# Altium PCB PCB1.PcbDoc
Units mm, origin at the board's own origin, x right, y up, seen from the top; angles counter-clockwise.
Board outline 46.99 x 49.15 mm, 2 copper layers (Top Layer, Bottom Layer); 31 components, 28 nets, 112 pads, 6 vias.
Unrouted connection lines stored in the file: 8.
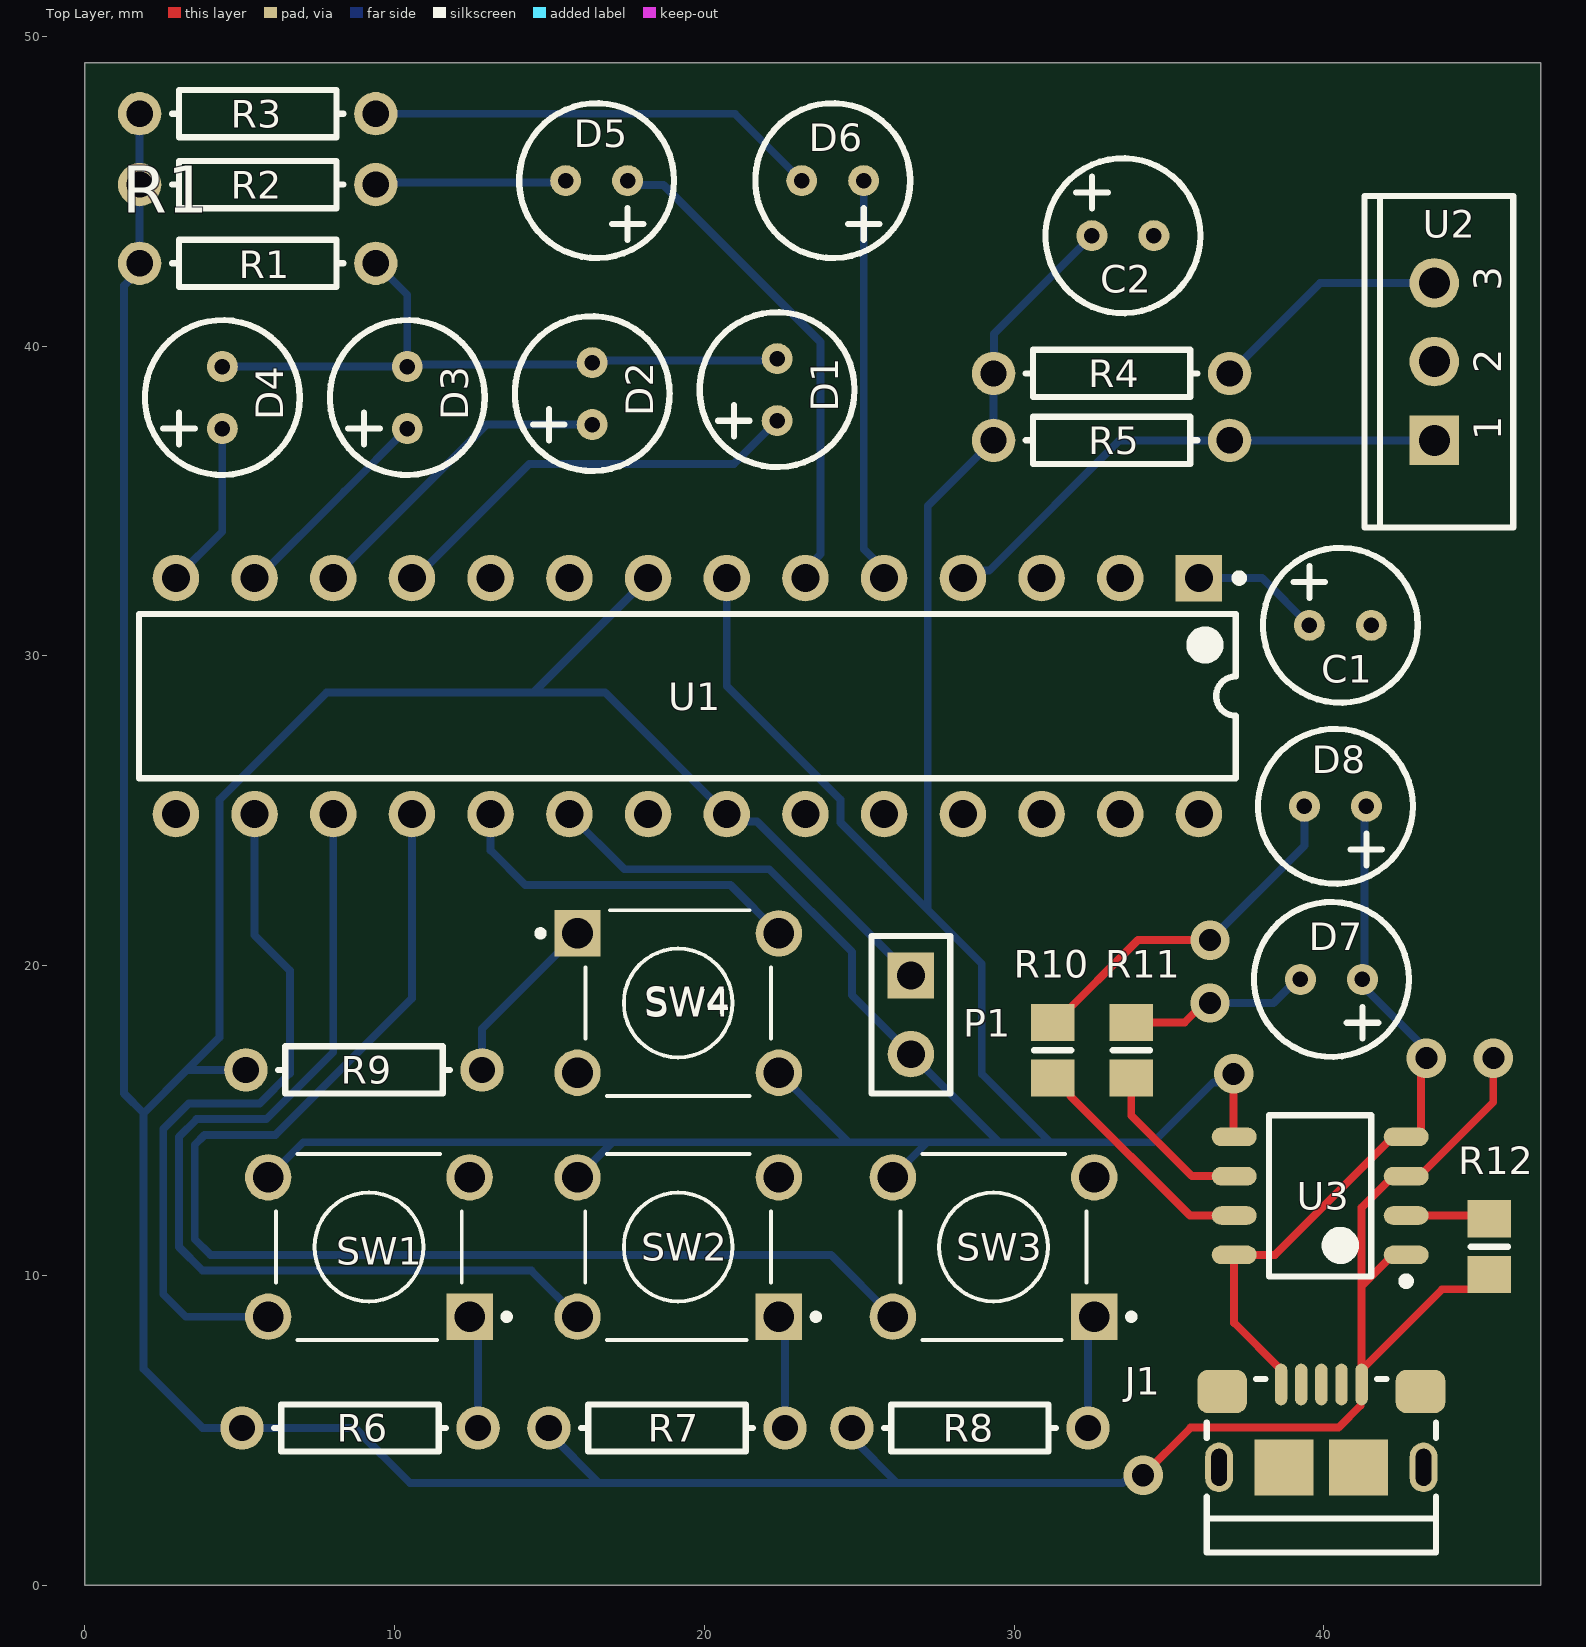
[diagram p0: Top Layer view]
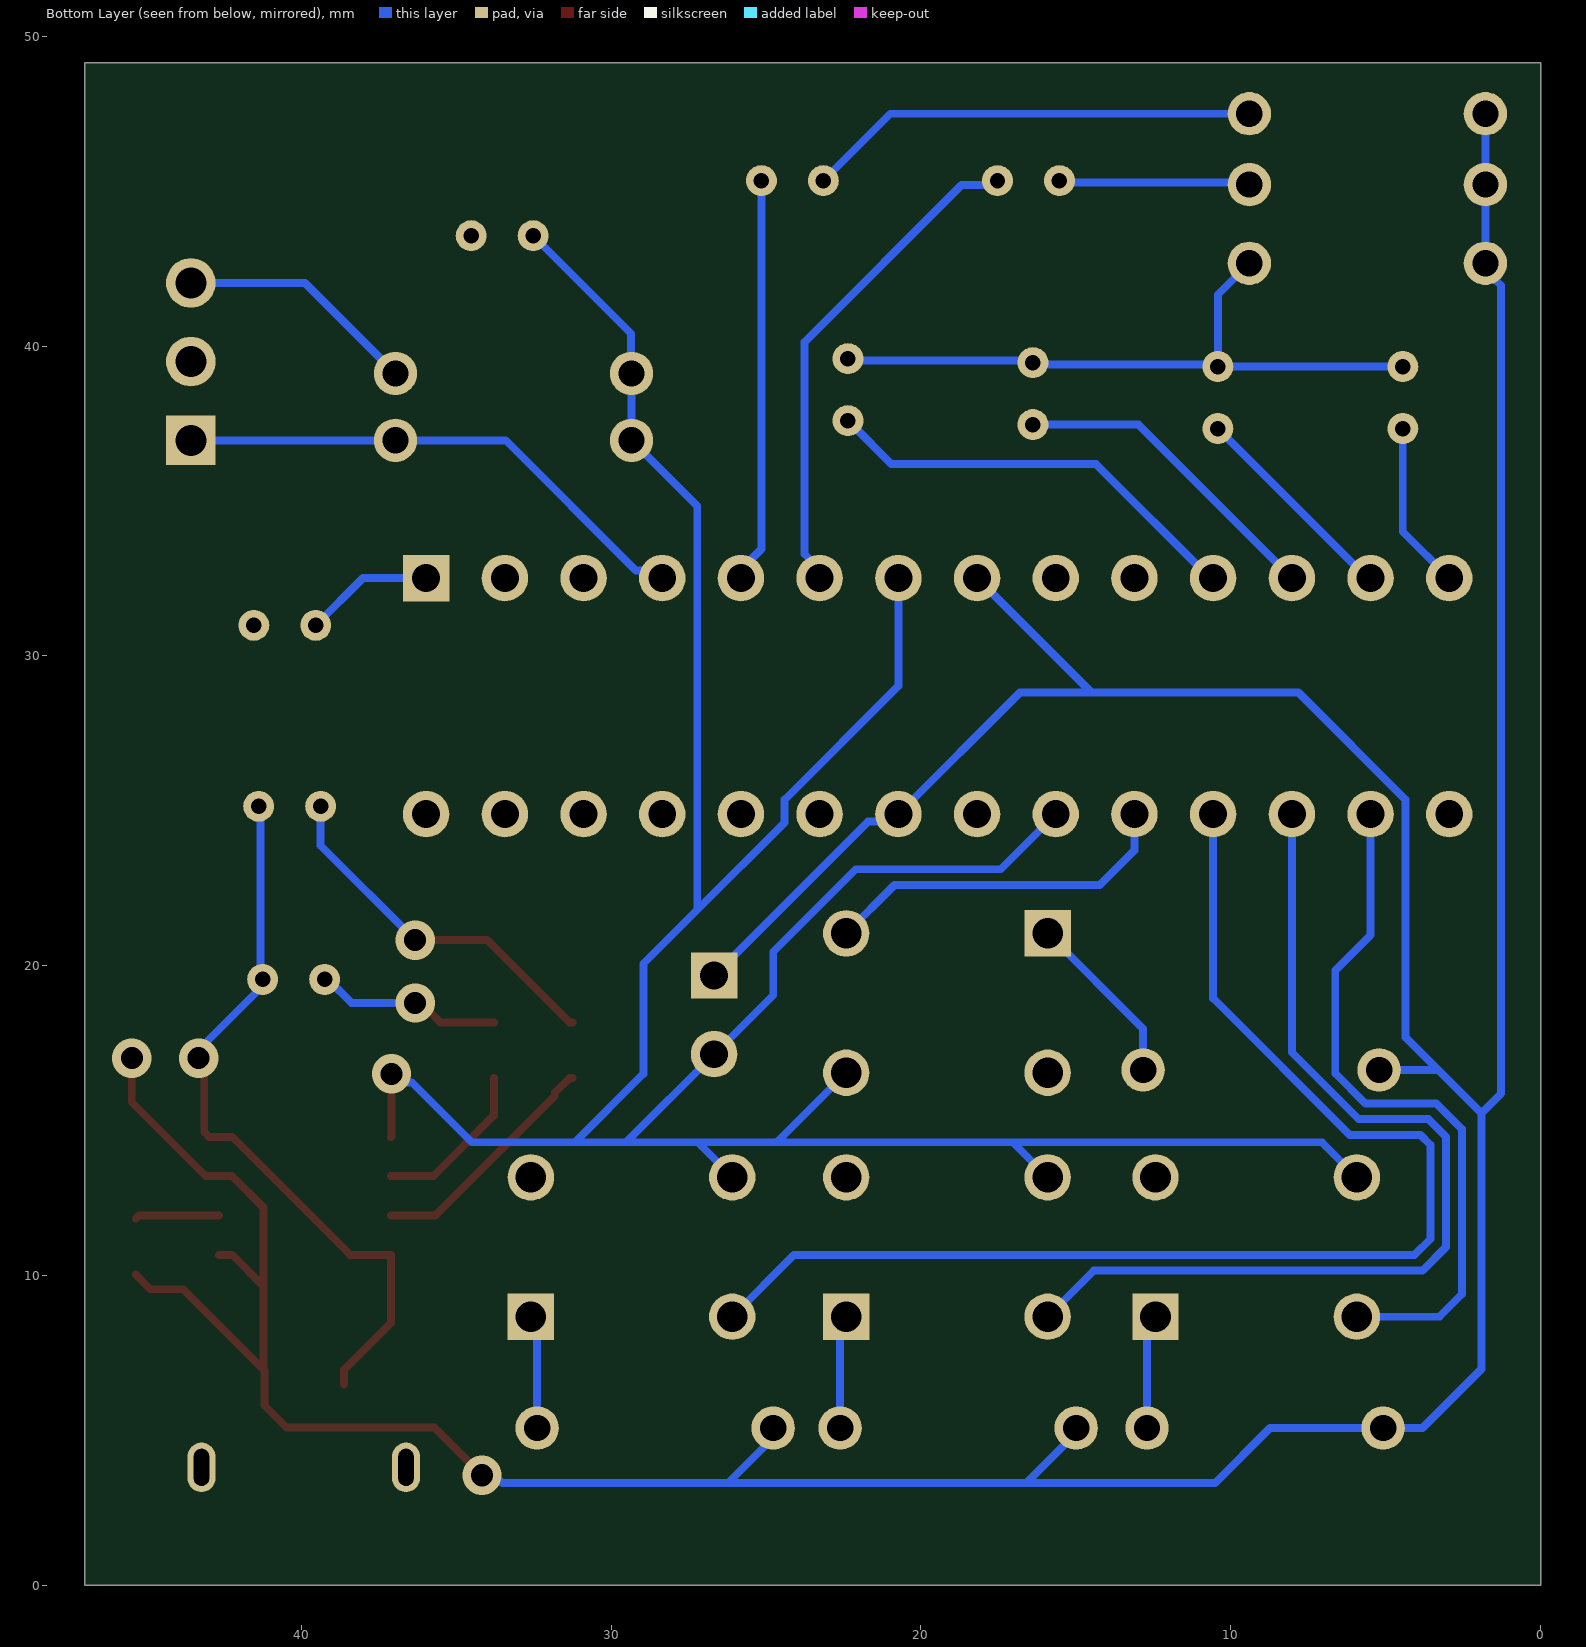
[diagram p1: Bottom Layer view, seen from below]

## Layer stack, top to bottom
Top Solder: solder mask 0.0102, Solder Resist, Dk 3.5
Top Layer: signal copper 0.0356
Dielectric 1: dielectric 0.32, FR-4, Dk 4.8
Bottom Layer: signal copper 0.0356
Bottom Solder: solder mask 0.0102, Solder Resist, Dk 3.5

## Board outline
0,0 0,49.149 46.99,49.149 46.99,0

## Design rules (kind name [scope] priority, off if disabled: settings)
BoardOutlineClearance [All] p1: gap=0.2 ignorepadtopadclearanceinfootprint=FALSE except(0.4: Arc-SplitBarrior Arc-SplitContinuation Track-SplitBarrior Track-SplitContinuation SMDPad-SplitBarrior SMDPad-SplitContinuation THPad-SplitBarrior THPad-SplitContinuation Via-SplitBarrior Via-SplitContinuation Fill-SplitBarrior Fill-SplitContinuation Poly-SplitBarrior Poly-SplitContinuation Region-SplitBarrior Region-SplitContinuation Text-SplitBarrior Text-SplitContinuation)
Clearance "Clearance Bottom Layer" [OnLayer('Bottom Layer')] p1: gap=0.203 ignorepadtopadclearanceinfootprint=TRUE except(0.254: Arc-Text Track-Text SMDPad-Text THPad-Text Via-Text Fill-Text Poly-Text Region-Text Text-Text)
Clearance "Clearance Top Layer" [OnLayer('Top Layer')] p2: gap=0.203 ignorepadtopadclearanceinfootprint=TRUE except(0.254: Arc-Text Track-Text SMDPad-Text THPad-Text Via-Text Fill-Text Poly-Text Region-Text Text-Text)
Clearance [All] p3: gap=0.2 ignorepadtopadclearanceinfootprint=FALSE except(0.089: Arc-Arc Arc-Track Arc-SMDPad Track-Track Track-SMDPad SMDPad-SMDPad; 0.127: Arc-Via Track-Via SMDPad-Via THPad-Via Via-Via; 0.254: Arc-Text Track-Text SMDPad-Text THPad-Text Via-Text Fill-Text Poly-Text Region-Text Text-Text)
HoleSize [All] p1: absolutevalues=TRUE maxlimit=6.3 minlimit=0.2 maxpercent=80.000 minpercent=20.000
MinimumAnnularRing [All] p1: minimumring=0.076
MinimumSolderMaskSliver [All] p1: minsoldermaskwidth=0.1
PolygonConnect PolygonConnect_1 [All] p1: thpad.connectstyle=Relief thpad.reliefconductorwidth=0.508 thpad.reliefentries=4 thpad.polygonreliefangle="90 Angle" thpad.airgapwidth=0.254 smdpad.connectstyle=Relief smdpad.reliefconductorwidth=0.508 smdpad.reliefentries=4 smdpad.polygonreliefangle="90 Angle" smdpad.airgapwidth=0.254 via.connectstyle=Direct via.reliefconductorwidth=0.508 via.reliefentries=4 via.polygonreliefangle="90 Angle" via.airgapwidth=0.254
RoutingCorners [All] p1: cornerstyle=Round minsetback=2.54 maxsetback=2.54
RoutingVias [All] p1: holewidth=0.5 width=1 viastyle="Through Hole" minholewidth=0.2 minwidth=0.45 maxholewidth=1 maxwidth=2
SilkToSilkClearance [All] p1: silktosilkclearance=0.1
SilkToSolderMaskClearance [IsPad] p1: minsilkscreentomaskgap=0.1 clearancetoexposedcopper=TRUE
SolderMaskExpansion [All] p1: expansion=0.102 istentingtop=FALSE
SupplyNets "Schematic Supply Nets_2" [InNet('VCC')] p1: voltage=0.000
SupplyNets "Schematic Supply Nets_1" [InNet('GND')] p2: voltage=0.000
SupplyNets "Schematic Supply Nets" [InNet('+5')] p3: voltage=0.000
Width [All] p1: maxlimit=2.54 minlimit=0.089 preferedwidth=0.381
25 further rules are at their usual default settings.

## Components (designator, comment, footprint, x,y, rotation, side; value= is the part's Value field where it differs from the comment)
C1 "Cap Pol1" "5mm CAP" 39.529,30.988 r0 top value=10uF
C2 "Cap Pol1" "5mm CAP" 32.512,43.561 r0 top value=100uF
D1 "GREEN" "5mm CAP" 22.352,37.592 r90 top
D2 "GREEN" "5mm CAP" 16.383,37.465 r90 top
D3 "GREEN" "5mm CAP" 10.414,37.338 r90 top
D4 "GREEN" "5mm CAP" 4.445,37.338 r90 top
D5 "RED" "5mm CAP" 17.526,45.339 r180 top
D6 "IR" "5mm CAP" 25.146,45.339 r180 top
D7 "GREEN" "5mm CAP" 41.243,19.558 r180 top
D8 "RED" "5mm CAP" 41.37,25.146 r180 top
J1 "10118193-0001LF" "FCI USB 10118193-0001LF" 39.916,3.86 r180 top
P1 "Header 2" HDR1X2 26.67,19.685 r270 top
R1 "Res1" AXIAL-0.3 5.588,42.672 r0 top value=1K
R2 "Res1" AXIAL-0.3 5.588,45.212 r0 top value=1K
R3 "Res1" AXIAL-0.3 5.588,47.498 r0 top value=220R
R4 "Res1" AXIAL-0.3 33.147,39.116 r0 top value=100R
R5 "Res1" AXIAL-0.3 33.147,36.957 r180 top value=47k
R6 "Res1" AXIAL-0.3 8.89,5.08 r0 top value=22k
R7 "Res1" AXIAL-0.3 18.796,5.08 r0 top value=22k
R8 "Res1" AXIAL-0.3 28.575,5.08 r0 top value=22k
R9 "Res1" AXIAL-0.3 9.017,16.637 r0 top value=22k
R10 "Res1" 6-0805_N 31.242,17.272 r90 top value=1K
R11 "Res1" 6-0805_N 33.782,17.272 r90 top value=1k
R12 "Res1" 6-0805_N 45.339,10.933 r90 top value=2k
SW1 "430476085716" SW_1825910-6-4 9.177,10.922 r180 top
SW2 "430476085716" SW_1825910-6-4 19.158,10.922 r180 top
SW3 "430476085716" SW_1825910-6-4 29.337,10.922 r180 top
SW4 "430476085716" SW_1825910-6-4 19.158,18.796 r0 top
U1 "ATmega328P-PU" 28P3 19.456,28.702 r270 top
U2 "CHO 1838" TO-220-AB 43.561,39.497 r90 top
U3 "TP4056" "Universal SOP 8" 39.878,12.573 r180 top

## Footprints (in the part's own frame and the unit in brackets; to place one, negate y for a bottom-side part, rotate by r counter-clockwise, add the part's x,y. Pads: shape width x height; smd on the part's side, far side on the other; paste and mask are expansions set on the pad)
"5mm CAP" [mm]
  round 1 hole 0.5: 1(0,0) 2(2,0)
  silkscreen extent -1.5,-2.5 3.5,2.5
6-0805_N [mm] "Chip Resistor, Body 2.0x1.2mm, IPC Medium Density"
  rect 1.2x1.4 smd: 1(-0.9,0) 2(0.9,0)
  silkscreen extent 0,-0.6 0,0.6, body extent -1.07,-0.7 1.07,0.7, height 0.7
28P3 [mm] "28-Pin Plastic Dual In-Line Package (PDIP)"
  rect 1.5x1.5 hole 0.9: 1(-3.81,16.51)
  round 1.5 hole 0.9: 2(-3.81,13.97) 3(-3.81,11.43) 4(-3.81,8.89) 5(-3.81,6.35) 6(-3.81,3.81) 7(-3.81,1.27) 8(-3.81,-1.27) 9(-3.81,-3.81) 10(-3.81,-6.35) 11(-3.81,-8.89) 12(-3.81,-11.43) 13(-3.81,-13.97) 14(-3.81,-16.51) 15(3.81,-16.51) 16(3.81,-13.97) 17(3.81,-11.43) 18(3.81,-8.89) 19(3.81,-6.35) 20(3.81,-3.81) 21(3.81,-1.27) 22(3.81,1.27) 23(3.81,3.81) 24(3.81,6.35) 25(3.81,8.89) 26(3.81,11.43) 27(3.81,13.97) 28(3.81,16.51)
  silkscreen extent -3.93,-17.7 2.65,17.94, body extent -3.6,-17.65 3.6,17.65, height 4.58
AXIAL-0.3 [mm] "Axial Device, Thru-Hole; 2 Leads; 0.3 in Pin Spacing"
  round 1.4 hole 0.85: 1(-3.81,0) 2(3.81,0)
  silkscreen extent -2.77,-0.76 2.77,0.76
"FCI USB 10118193-0001LF" [mm] "USB 2.0 Type B Micro"
  oval 0.4x1.35 smd: 1(1.3,-2.625) 2(0.65,-2.625) 3(0,-2.625) 4(-0.65,-2.625) 5(-1.3,-2.625)
  oval 0.9x1.6 hole 0.5 slot 1.2 at 90 deg: S(-3.3,0.05) S(3.3,0.05)
  rrect50% 1.6x1.4 smd: S(-3.2,-2.4) S(3.2,-2.4)
  rect 1.9x1.8 smd: S(-1.2,0.05) S(1.2,0.05)
  silkscreen extent -3.7,-2.8 3.7,2.8, body extent -3.93,-2.9 3.93,2.76, height 2.78
HDR1X2 [mm] "Connector; Header; 2 Position"
  rect 1.5x1.5 hole 0.9: 1(0,0)
  round 1.5 hole 0.9: 2(2.54,0)
  silkscreen extent -1.27,-1.27 3.81,1.27
SW_1825910-6-4 [mm]
  rect 1.498x1.498 hole 0.99: 1(-3.25,2.25)
  round 1.498 hole 0.99: 2(3.25,2.25) 3(-3.25,-2.25) 4(3.25,-2.25)
  silkscreen extent -4.54,-3 3,3
TO-220-AB [mm] "TO, Thru-Hole, Vertical, Heatsink Mounted; 3 In-Line Leads; Pitch 2.54 mm"
  rect 1.6x1.6 hole 1: 1(-2.54,0)
  round 1.6 hole 1: 2(0,0) 3(2.54,0)
  silkscreen extent -5.35,-2.55 5.35,2.25
"Universal SOP 8" [mm]
  oval 1.45x0.6 smd: 1(-2.775,1.905) 2(-2.775,0.635) 3(-2.775,-0.635) 4(-2.775,-1.905) 5(2.775,-1.905) 6(2.775,-0.635) 7(2.775,0.635) 8(2.775,1.905)
  silkscreen extent -2.9,-2.6 1.65,2.88, body extent -3,-2.6 3,2.6, height 1.75

## Part data
C1 C2: "Polarized Capacitor (Radial)", LatestRevisionDate=17-Jul-2002, LatestRevisionNote="Re-released for DXP Platform.", PackageDescription="Polarized Capacitor (Radial); 2 Leads", PackageReference=RB7.6-15, Published=8-Jun-2000, Publisher="Altium Limited"
D1 D2 D3 D4 D5 D6 D7 D8: library part LED0, "Typical INFRARED GaAs LED", LatestRevisionDate=08-Jul-2005, LatestRevisionNote="Mech Layer 1 removed.", PackageDescription="LED; 2 Leads", PackageReference=LED-0, Published=8-Jun-2000, Publisher="Altium Limited"
J1: "CONN RCPT USB2.0 MICRO B SMD R/A", Current Rating (Amps)="1.8A per Contact", Manufacturer="Amphenol ICC (FCI)", Operating Temperature="-30°C ~ 80°C", Supplier Part Number 1=609-4616-2-ND, Voltage - Rated=100VAC, ComponentLink1Description=Datasheet, ComponentLink1URL=https://cdn.amphenol-icc.com/media/wysiwyg/files/documentation/datasheet/inputoutput/io_usb_micro.pdf, ComponentLink2Description="DigiKey Link", ComponentLink2URL=//digikey.com/product-detail/en/amphenol-icc-fci/10118193-0001LF/609-4616-2-ND/2785388, Connector Type="USB - micro B", Features="Solder Retention", Gender=Receptacle, LastUpdated="12/9/2019 8:51:28 PM", Lifecycle Status=0, Mating Cycles=10000, Minimum Order=1, Mounting Feature=Horizontal, Mounting Type="Surface Mount, Right Angle; Through Hole", Number of Contacts=5, Number of Ports=1, Packaging=TapeAndReel, Part Number=10118193-0001LF, Part Status=Active, Price=0.21, Series=-, Shielding=Shielded, Specifications="USB 2.0", Supplier 1=DigiKey, Termination=Solder
P1: "Header, 2-Pin", LatestRevisionDate=17-Jul-2002, LatestRevisionNote="Re-released for DXP Platform.", Publisher="Altium Limited"
R1 R2 R3 R4 R5 R6 R7 R8 R9 R10 R11 R12: "Resistor", LatestRevisionDate=17-Jul-2002, LatestRevisionNote="Re-released for DXP Platform.", PackageDescription="Axial Device, Thru-Hole; 2 Leads; 0.3 in Pin Spacing", PackageReference=AXIAL-0.3, Published=8-Jun-2000, Publisher="Altium Limited"
SW1 SW2 SW3 SW4: "WS-TATV THT Tact Switch 12X12 mm", ComponentLink1Description="Manufacturer URL", ComponentLink1URL=http://www.we-online.com, ComponentLink2Description=Datasheet, ComponentLink2URL=http://katalog.we-online.de/em/datasheet/430476085716.pdf, NoPins=04, PackageReference=430476085716, PartNumber=430476085716
U1: "8-bit AVR Microcontroller, 32KB Flash, 1KB EEPROM, 2KB SRAM, 28-pin PDIP, Industrial Grade (-40°C to 85°C)", ComponentLink1Description="Manufacturer URL", ComponentLink1URL=http://www.atmel.com/, ComponentLink2Description="ATmega48A/48PA/88A/88PA/168A/168PA/328/328P Datasheet", ComponentLink2URL=http://www.atmel.com/dyn/resources/prod_documents/8271.pdf, ComponentLink3Description="ATmega48A/48PA/88A/88PA/168A/168PA/328/328P Summary", ComponentLink3URL=http://www.atmel.com/dyn/resources/prod_documents/8271S.pdf, DatasheetVersion="revD, May-2011", PackageDescription="28-lead (0.300\"/7.62mm Wide) Plastic Dual Inline Package (PDIP)", PackageReference=28P3, PackageVersion="revB, Sep-2001"
U2: "IR Receiver"

## Via types
v1: diameter 1.27, hole 0.711, Top Layer to Bottom Layer, 6 vias

## Nets (pads, with @x,y where several pads share a name; then routed paths per layer and width w, separated by ;. In a path a pad name is that pad's centre, name@x,y a point inside that pad or via, vN(x,y) a via of type N, cw(c..) or ccw(c..) an arc to the next point about the centre after c; other vN are vias at no path point)
+5: D7.1 D8.1 J1.1 U3.4 U3.8 | length 24
  Top Layer w0.254: J1.1 38.616,6.96 37.103,8.473 U3.8 38.418,10.668 42.228,14.478 U3.4 42.969,14.478 43.129,14.638 43.129,16.84 v1(43.307,17.018)
  Bottom Layer w0.254: D8.1 41.307,25.082 41.307,19.621 D7.1 41.243,19.356 43.307,17.292 v1(43.307,17.018)
GND: C1.2 C2.2 J1.5 J1.S P1.1 R1.1 R2.1 R3.1 R6.1 R7.1 R8.1 R9.1 R12.1 U1.8 U1.22 U2.2 U3.1 U3.3 | length 154.2
  Top Layer w0.254: v1(34.163,3.556) 35.698,5.091 40.469,5.091 41.188,5.81 41.188,6.932 J1.5@41.216,6.96 ; U3.1 42.228,10.668 41.216,9.656 ; R12.1 44.866,9.56 43.816,9.56 J1.5@41.216,6.96 ; v1(45.466,17.018) 45.466,15.596 43.078,13.208 U3.3 42.228,13.208 41.216,12.196 41.216,9.656 ; J1.5@41.216,6.96 41.216,9.656
  Bottom Layer w0.254: R3.1 R2.1 R1.1 1.778,42.458 1.27,41.95 1.27,15.875 1.905,15.24 ; R9.1 3.302,16.637 ; R7.1 14.986,4.922 16.606,3.302 ; U1.8 14.491,28.817 ; R8.1 24.765,4.77 26.233,3.302 ; P1.1 21.701,24.654 20.964,24.654 U1.22 16.801,28.817 14.491,28.817 ; v1(34.163,3.556) 33.969,3.362 33.566,3.362 33.506,3.302 26.233,3.302 ; 1.905,15.24 3.302,16.637 ; 1.905,15.24 1.905,6.985 3.81,5.08 R6.1 8.728,5.08 10.506,3.302 16.606,3.302 ; 3.302,16.637 4.355,17.69 4.355,25.36 7.811,28.817 14.491,28.817 ; 16.606,3.302 26.233,3.302
IR_RX: R5.1 U1.4 U2.1 | length 17.1
  Bottom Layer w0.254: U1.4 28.584,32.75 29.194,32.75 33.401,36.957 R5.1 U2.1
IR_TX: D6.1 U1.5 | length 13.1
  Bottom Layer w0.254: D6.1 25.146,33.452 25.806,32.792 U1.5
NetC1_1: C1.1 U1.1 | length 4.2
  Bottom Layer w0.254: U1.1 38.005,32.512 C1.1
NetD1_1: D1.1 U1.11 | length 14
  Bottom Layer w0.254: U1.11 10.668,32.512 14.351,36.195 20.955,36.195 22.225,37.465 22.352,37.465 D1.1
NetD1_2: D1.2 D2.2 D3.2 D4.2 R1.2 | length 21.7
  Bottom Layer w0.254: D4.2 D3.2 ; R1.2@9.398,42.291 R1.2@9.398,42.362 ; R1.2 10.414,41.656 D3.2 ; D2.2 16.319,39.402 10.477,39.402 D3.2 ; D2.2@16.447,39.529 22.288,39.529 D1.2
NetD2_1: D2.1 U1.12 | length 10.4
  Bottom Layer w0.254: U1.12 12.979,37.465 D2.1
NetD3_1: D3.1 U1.13 | length 6.9
  Bottom Layer w0.254: U1.13 5.588,32.512 8.377,35.301 D3.1
NetD4_1: D4.1 U1.14 | length 5.4
  Bottom Layer w0.254: U1.14 4.445,34.011 D4.1
NetD5_1: D5.1 U1.6 | length 16.2
  Bottom Layer w0.254: D5.1 17.669,45.196 18.685,45.196 23.749,40.132 23.749,33.284 23.266,32.801 U1.6
NetD5_2: D5.2 R2.2 | length 6.2
  Bottom Layer w0.254: R2.2 9.461,45.276 15.462,45.276 D5.2
NetD6_2: D6.2 R3.2 | length 14.6
  Bottom Layer w0.254: R3.2 20.987,47.498 D6.2
NetD7_2: D7.2 R11.2 | length 6
  Top Layer w0.254: R11.2 35.509,18.172 36.133,18.796 v1(36.322,18.796)
  Bottom Layer w0.254: v1(36.322,18.796) 38.37,18.796 39.132,19.558 D7.2
NetD8_2: D8.2 R10.2 | length 11.8
  Top Layer w0.254: R10.2 31.342,18.172 33.998,20.828 v1(36.322,20.828)
  Bottom Layer w0.254: v1(36.322,20.828) 39.37,23.876 D8.2
NetR4_2: R4.2 U2.3 | length 7.8
  Bottom Layer w0.254: R4.2 39.878,42.037 U2.3
NetR6_2: R6.2 SW1.1 | length 3.7
  Bottom Layer w0.254: SW1.1 12.7,8.399 R6.2
NetR7_2: R7.2 SW2.1 | length 3.7
  Bottom Layer w0.254: SW2.1 22.606,8.474 R7.2
NetR8_2: R8.2 SW3.1 | length 3.7
  Bottom Layer w0.254: R8.2 32.385,8.47 SW3.1
NetR9_2: R9.2 SW4.1 | length 5.7
  Bottom Layer w0.254: R9.2 12.827,17.965 SW4.1
NetR10_1: R10.1 U3.7 | length 7.8
  Top Layer w0.254: R10.1 31.342,16.372 31.815,15.899 31.815,15.799 35.676,11.938 U3.7
NetR11_1: R11.1 U3.6 | length 5.3
  Top Layer w0.254: R11.1 33.782,15.166 35.74,13.208 U3.6
NetR12_2: R12.2 U3.2 | length 2.7
  Top Layer w0.254: U3.2 45.234,11.938 R12.2
SW1: SW1.2 U1.16 | length 22.7
  Bottom Layer w0.254: U1.16 5.486,20.986 6.626,19.846 6.626,16.527 5.655,15.556 3.364,15.556 2.54,14.732 2.54,9.398 3.266,8.672 SW1.2
SW2: SW2.2 U1.17 | length 31.1
  Bottom Layer w0.254: U1.17 8.026,17.209 5.865,15.048 3.618,15.048 3.048,14.478 3.048,10.922 3.81,10.16 14.42,10.16 SW2.2
SW3: SW3.2 U1.18 | length 41.5
  Bottom Layer w0.254: U1.18 10.566,18.948 6.158,14.54 3.872,14.54 3.556,14.224 3.556,11.176 4.064,10.668 24.091,10.668 SW3.2
SW4: SW4.2 U1.19 | length 11.6
  Bottom Layer w0.254: U1.19 13.106,23.724 14.224,22.606 20.848,22.606 SW4.2
VCC: C2.1 P1.2 R4.1 R5.2 SW1.3 SW1.4 SW2.3 SW2.4 SW3.3 SW3.4 SW4.3 SW4.4 U1.7 U1.20 U3.5 | length 106.5
  Top Layer w0.254: v1(37.084,16.51) 37.084,14.497 U3.5
  Bottom Layer w0.254: SW1.4 7.057,14.302 17.038,14.302 ; U1.20 17.424,23.114 22.098,23.114 24.765,20.447 24.765,19.05 P1.2 29.513,14.302 ; SW2.4 17.038,14.302 ; U1.7 20.726,29.031 24.397,25.36 24.397,24.625 27.215,21.807 ; SW4.4 24.652,14.302 ; SW3.4 26.087,13.193 27.196,14.302 ; C2.1 29.35,40.399 29.35,39.129 R4.1 R5.2 27.215,34.835 27.215,21.807 ; v1(37.084,16.51) 36.809,16.51 36.535,16.236 36.429,16.236 34.495,14.302 31.164,14.302 ; 17.038,14.302 24.652,14.302 ; 24.652,14.302 27.196,14.302 ; 27.196,14.302 29.513,14.302 ; 27.215,21.807 28.956,20.066 28.956,16.51 31.164,14.302 ; 29.513,14.302 31.164,14.302
pads on no net: J1.2 J1.3 J1.4 U1.2 U1.3 U1.9 U1.10 U1.15 U1.21 U1.23 U1.24 U1.25 U1.26 U1.27 U1.28

## Silkscreen, mask and mechanical layers (free items; w line width, h text height)
Top Overlay:
  text "R1" at 4.976,42.187 h0.9
  text "SW4" at 18.057,18.438 h0.9
Mechanical 13:
  the board outline again, w0.2

## Text inside footprints (layer, text, board x,y; h text height)
U2: Top Overlay "1" at 45.72,36.957 h0.9 r90; Top Overlay "2" at 45.72,39.116 h0.9 r90; Top Overlay "3" at 45.72,41.783 h0.9 r90